# Altium PCB BLDC_Controller.PcbDoc
Units mm, origin at the board's own origin, x right, y up, seen from the top; angles counter-clockwise.
Board outline 23.6 x 24.89 mm, 4 copper layers (Top Layer, VCC, GND, Bottom Layer); 16 components, 15 nets, 93 pads, 8 vias.
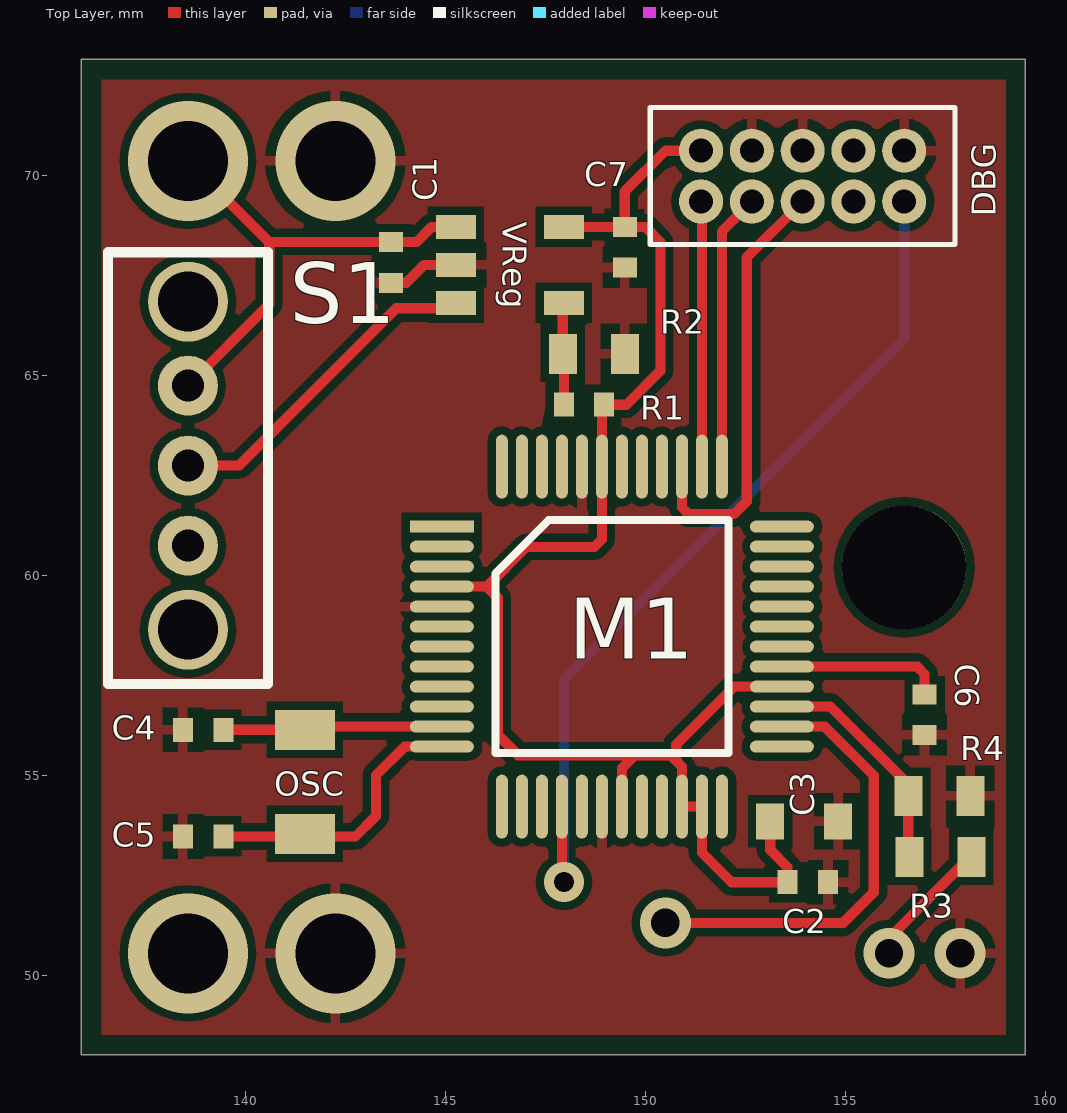
[diagram p0: Top Layer view]
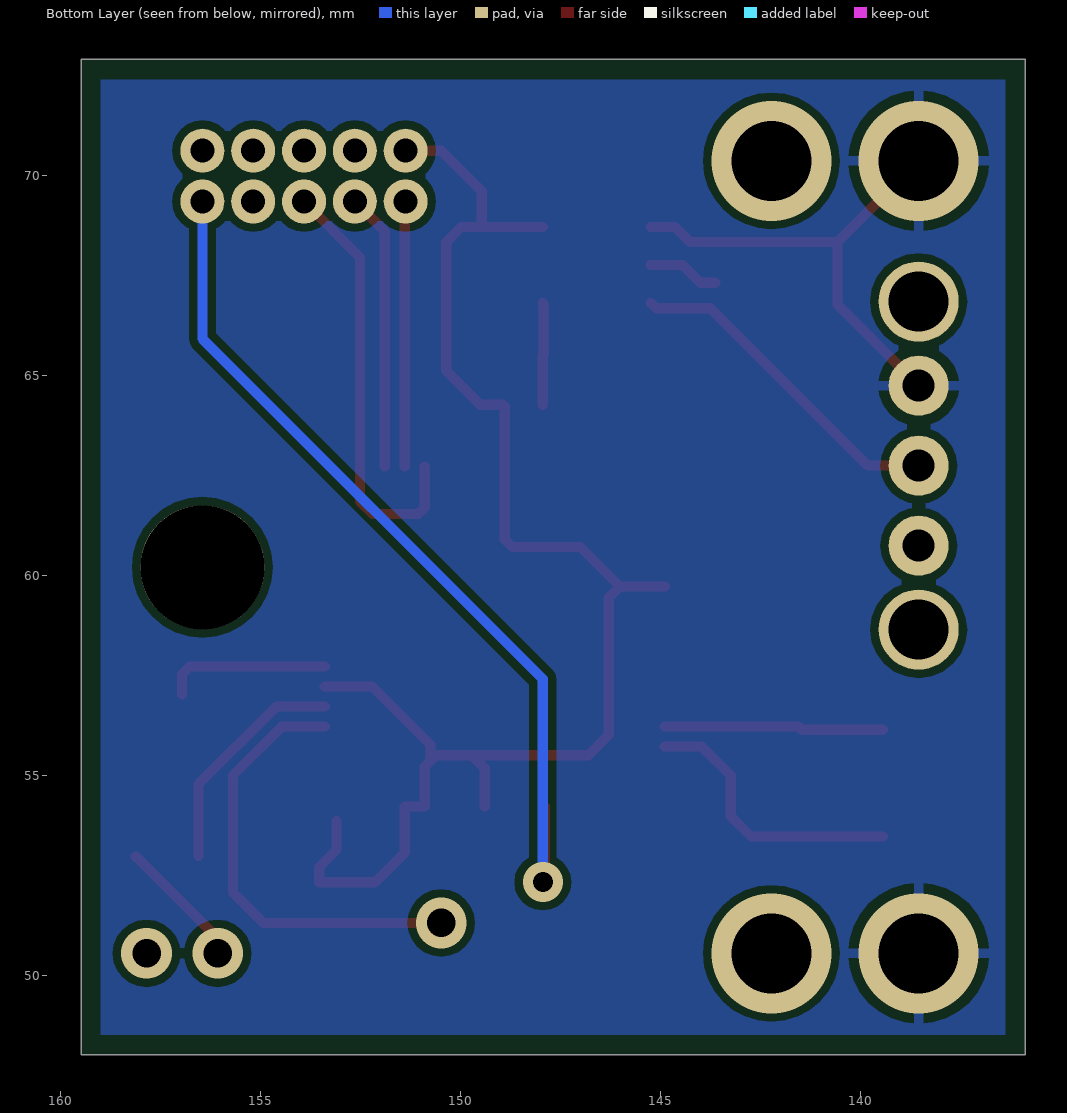
[diagram p1: Bottom Layer view, seen from below]
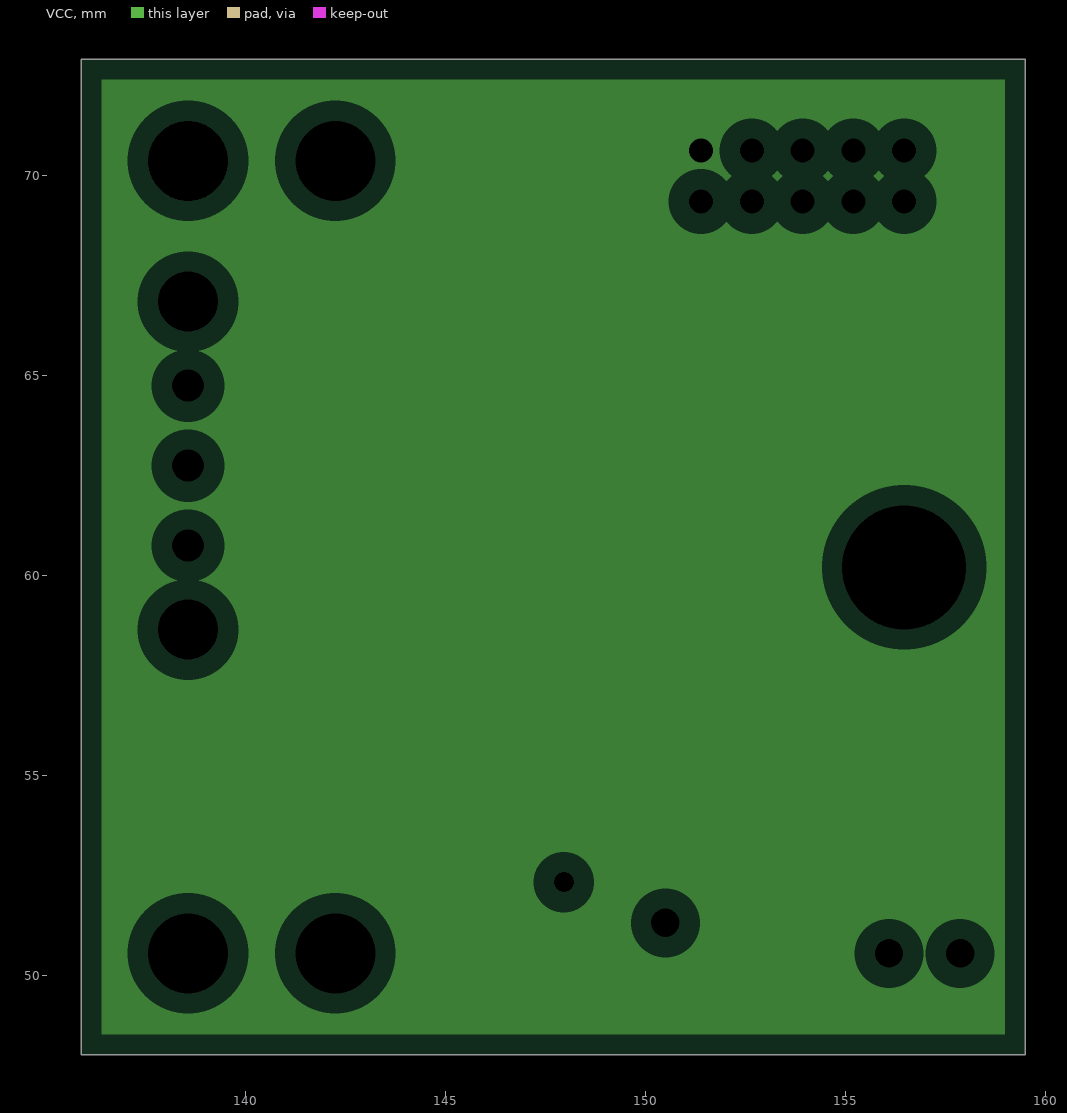
[diagram p2: VCC, clearances drawn from the general rule]
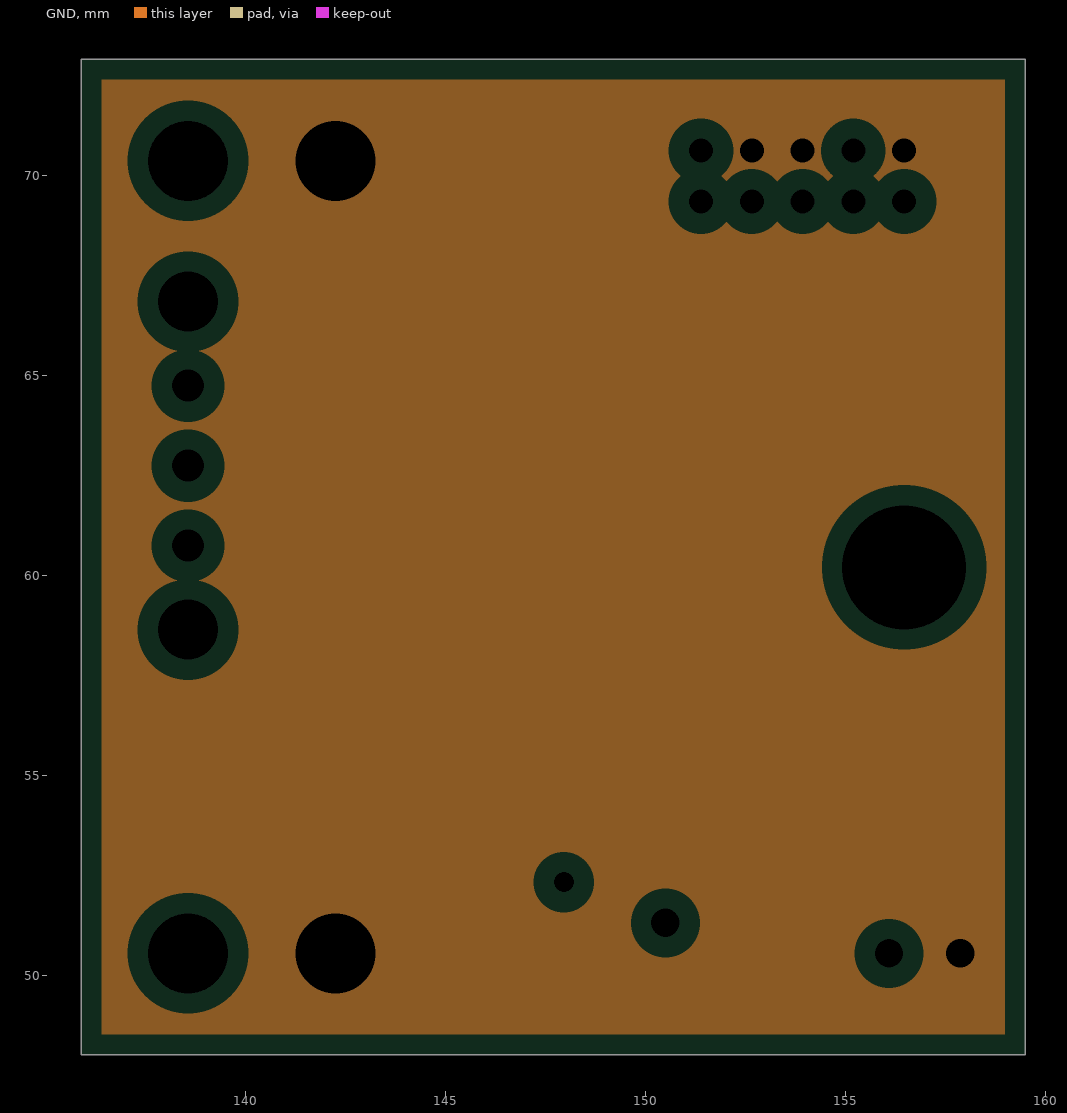
[diagram p3: GND, clearances drawn from the general rule]

## Layer stack, top to bottom
Top Layer: signal copper 0.0356
Dielectric: prepreg 0.32, FR-4, Dk 4.8
VCC: plane copper 0.0356, net 3V5
Dielectric: core 0.32, FR-4, Dk 4.8
GND: plane copper 0.0356, net GND
Dielectric: prepreg 0.32, FR-4, Dk 4.8
Bottom Layer: signal copper 0.0356

## Board outline
135.89,48.006 135.89,72.898 159.493,72.898 159.493,48.006

## Design rules (kind name [scope] priority, off if disabled: settings)
Clearance [All] p1: gap=0.2
PlaneClearance [All] p1: clearance=0.508
PlaneConnect [All] p1: planeconnectstyle=Relief reliefexpansion=0.508 reliefentries=4 reliefconductorwidth=0.254 reliefairgap=0.254
PolygonConnect [All] p1: connectstyle=Relief reliefconductorwidth=0.254 reliefentries=4 polygonreliefangle="90 Angle" airgapwidth=0.254
RoutingVias [All] p1: holewidth=0.711 width=1.27 viastyle="Through Hole" minholewidth=0.711 minwidth=1.27 maxholewidth=0.711 maxwidth=1.27
SolderMaskExpansion [All] p1: expansion=0.102
Width [All] p1: maxlimit=0.254 minlimit=0.2 preferedwidth=0.254
26 further rules are at their usual default settings.

## Components (designator, comment, footprint, x,y, rotation, side; value= is the part's Value field where it differs from the comment)
C1 "1u" "Capacitor 0402" 143.637,67.31 r90 top
C2 "100n" "Capacitor 0402" 153.543,52.324 r0 top
C3 "4.7u" "Capacitor 0603" 154.813,53.848 r180 top
C4 "12p" "Capacitor 0402" 138.43,56.134 r0 top
C5 "12p" "Capacitor 0402" 138.43,53.467 r0 top
C6 "1u" "Capacitor 0402" 156.972,57.023 r270 top
C7 "1u" "Capacitor 0402" 149.479,67.691 r90 top
DBG "20021111-00010T4LF" 20021111-00010T4LF 156.464,69.342 r180 top
M1 "EFM32TG822F32" EFM32TG822F32 144.907,61.214 r0 top
OSC "ST3215SB32768H5HSZA1" ST3215SB32768H5HSZA1 141.478,56.134 r270 top
R1 "1M" "Resistor 0402" 147.955,64.262 r0 top
R2 "536k" "Resistor 0603" 149.479,65.532 r180 top
R3 "Resistor 0603" "Resistor 0603" 156.591,52.959 r0 top
R4 "Resistor 0603" "Resistor 0603" 158.115,54.483 r180 top
S1 "OS102011MA1QN1" OS102011MA1QN1 138.557,62.738 r270 top
VReg "TPS78001DDCR" TPS78001DDCR 147.955,68.707 r270 top

## Footprints (in the part's own frame and the unit in brackets; to place one, negate y for a bottom-side part, rotate by r counter-clockwise, add the part's x,y. Pads: shape width x height; smd on the part's side, far side on the other; paste and mask are expansions set on the pad)
20021111-00010T4LF [mm]
  round 1.1 hole 0.6: 1(0,0) 2(1.27,0) 3(2.54,0) 4(3.81,0) 5(5.08,0) 6(0,-1.27) 7(1.27,-1.27) 8(2.54,-1.27) 9(3.81,-1.27) 10(5.08,-1.27)
  silkscreen extent -1.27,-2.35 6.35,1.08
"Capacitor 0402" [mm]
  rect 0.5x0.6 smd: 1(0,0) 2(1.016,0)
"Capacitor 0603" [mm]
  rect 0.7x0.9 smd: 1(0,0) 2(1.7,0)
EFM32TG822F32 [mm]
  rect 1.6x0.3 smd: 1(0,0)
  oval 1.6x0.3 smd: 2(0,-0.5) 3(0,-1) 4(0,-1.5) 5(0,-2) 6(0,-2.5) 7(0,-3) 8(0,-3.5) 9(0,-4) 10(0,-4.5) 11(0,-5) 12(0,-5.5) 25(8.5,-5.5) 26(8.5,-5) 27(8.5,-4.5) 28(8.5,-4) 29(8.5,-3.5) 30(8.5,-3) 31(8.5,-2.5) 32(8.5,-2) 33(8.5,-1.5) 34(8.5,-1) 35(8.5,-0.5) 36(8.5,0)
  oval 0.3x1.6 smd: 13(1.5,-7) 14(2,-7) 15(2.5,-7) 16(3,-7) 17(3.5,-7) 18(4,-7) 19(4.5,-7) 20(5,-7) 21(5.5,-7) 22(6,-7) 23(6.5,-7) 24(7,-7) 37(7,1.5) 38(6.5,1.5) 39(6,1.5) 40(5.5,1.5) 41(5,1.5) 42(4.5,1.5) 43(4,1.5) 44(3.5,1.5) 45(3,1.5) 46(2.5,1.5) 47(2,1.5) 48(1.5,1.5)
  silkscreen extent 1.33,-5.66 7.16,0.17
OS102011MA1QN1 [mm]
  round 1.5 hole 0.8: 1(-2,0) 2(0,0) 3(2,0)
  round 2 hole 1.5: ""(-4.1,0) ""(4.1,0)
  silkscreen extent -5.33,-2 5.46,2
"Resistor 0402" [mm]
  rect 0.5x0.6 smd: 1(0,0) 2(1,0)
"Resistor 0603" [mm]
  rect 0.7x1 smd: 1(0,0) 2(1.55,0)
ST3215SB32768H5HSZA1 [mm]
  rect 1x1.5 smd: 1(0,0) 2(2.6,0)
TPS78001DDCR [mm]
  rect 0.6x1 smd: 1(0,-2.7) 2(0.95,-2.7) 3(1.9,-2.7) 4(1.9,0) 5(0,0)

## Part data
C1 C2 C4 C5 C6 C7: library part "Capacitor 0402"
C3: library part "Capacitor 0603"
R1: library part "Resistor 0402"
R2: library part "Resistor 0603"

## Free pads (board coordinates)
  round 3.1 hole 3.1: 1(156.464,60.198)

## Via types
v1: diameter 3, hole 2, Top Layer to Bottom Layer, 4 vias
v2: diameter 1.27, hole 0.711, Top Layer to Bottom Layer, 3 vias
v3: diameter 1, hole 0.5, Top Layer to Bottom Layer, 1 vias

## Nets (pads, with @x,y where several pads share a name; then routed paths per layer and width w, separated by ;. In a path a pad name is that pad's centre, name@x,y a point inside that pad or via, vN(x,y) a via of type N, cw(c..) or ccw(c..) an arc to the next point about the centre after c; other vN are vias at no path point)
3V5: C2.1 C3.2 C7.2 DBG.10 M1.4 M1.19 M1.22 M1.23 M1.28 M1.43 R1.2 VReg.5 | length 39.3
  Top Layer w0.254: M1.4 146.026,59.714 ; VReg.5 C7.2 ; M1.19 149.407,55.173 149.733,55.499 ; DBG.10 150.495,70.612 149.479,69.596 C7.2 ; C3.2 153.113,53.135 153.543,52.705 C2.1 152.146,52.324 151.407,53.063 M1.23 M1.22 150.907,55.214 150.764,55.357 ; M1.28 152.21,57.214 150.764,55.768 150.764,55.357 ; 146.026,59.714 147.018,60.706 148.717,60.706 148.907,60.896 M1.43 148.907,64.214 R1.2 149.521,64.262 150.368,65.109 150.368,68.326 149.987,68.707 C7.2 ; 146.026,59.714 146.304,59.436 146.304,56.007 146.812,55.499 149.733,55.499 ; 149.733,55.499 150.622,55.499 150.764,55.357
12V: C1.2 S1.1 VReg.1 | length 12.1
  Top Layer w0.254: S1.1 140.589,66.77 140.589,68.326 ; v1(138.557,70.358) 140.589,68.326 ; VReg.1 144.653,68.707 144.272,68.326 140.589,68.326
  other v1: 138.557,50.546
DRIVE: R3.2 | length 3.3
  Top Layer w0.254: v2(156.083,50.546) 156.083,50.927 158.115,52.959 R3.2
GND: C1.1 C2.2 C3.1 C4.1 C5.1 C6.2 C7.1 DBG.6 DBG.8 DBG.9 M1.5 M1.18 M1.44 R2.1 R4.1 VReg.2 | length 1.8
  Top Layer w0.254: C1.1 144.018,67.31 144.465,67.757 VReg.2 ; DBG.8 DBG.8@153.924,70.659
  other v1: 142.24,50.546 142.24,70.358
  other v2: 157.861,50.546
NetC4_2: C4.2 M1.11 OSC.1 | length 5.5
  Top Layer w0.254: C4.2 OSC.1 141.558,56.214 M1.11
NetC5_2: C5.2 M1.12 OSC.2 | length 7
  Top Layer w0.254: C5.2 142.748,53.467 143.256,53.975 143.256,54.991 143.979,55.714 M1.12
NetC6_1: C6.1 M1.29 | length 4.1
  Top Layer w0.254: M1.29 156.789,57.714 156.972,57.531 C6.1
NetM1_27: M1.27 R3.1 R4.2 | length 5.7
  Top Layer w0.254: M1.27 154.621,56.714 156.565,54.77 R4.2 R3.1@156.565,52.985
NetR1_1: R1.1 R2.2 VReg.4 | length 2.6
  Top Layer w0.254: R1.1 147.955,65.506 R2.2 147.929,66.781 VReg.4
NetS1_2: S1.2 VReg.3 | length 8.4
  Top Layer w0.254: S1.2 139.827,62.738 143.764,66.675 145.123,66.675 VReg.3
PWM: M1.26 | length 11.2
  Top Layer w0.254: v2(150.495,51.308) 154.94,51.308 155.702,52.07 155.702,54.991 154.479,56.214 M1.26
RESETN: DBG.1 M1.16 | length 22.4
  Top Layer w0.254: v3@147.907,52.324 M1.16
  Bottom Layer w0.254: v3(147.955,52.324) 147.955,57.404 156.464,65.913 DBG.1
SWCLK: DBG.4 M1.37 | length 6.9
  Top Layer w0.254: M1.37 151.907,68.595 DBG.4
SWDIO: DBG.5 M1.38 | length 6.6
  Top Layer w0.254: DBG.5 151.407,69.319 M1.38
SWO: DBG.3 M1.39 | length 10.9
  Top Layer w0.254: M1.39 150.907,61.691 151.065,61.533 152.211,61.533 152.527,61.849 152.527,67.945 DBG.3
pads on no net: DBG.2 DBG.7 M1.1 M1.2 M1.3 M1.6 M1.7 M1.8 M1.9 M1.10 M1.13 M1.14 M1.15 M1.17 M1.20 M1.21 M1.24 M1.25 M1.30 M1.31 M1.32 M1.33 M1.34 M1.35 M1.36 M1.40 M1.41 M1.42 M1.45 M1.46 M1.47 M1.48 S1. S1.3

## Polygon pours and split planes (outlines as drawn)
12V on Bottom Layer "Bottom Layer-No Net" (solid, pour order 4): 136.398,72.39 159.004,72.39 159.004,48.514 136.398,48.514
GND on Top Layer "Bottom Layer-No Net" (solid, pour order 3): 159.004,48.514 159.004,72.39 136.398,72.39 136.398,48.514
3V5 on VCC (split plane): 158.983,48.516 136.4,48.516 136.4,72.388 158.983,72.388
GND on GND (split plane): 158.983,48.516 136.4,48.516 136.4,72.388 158.983,72.388

## Silkscreen, mask and mechanical layers (free items; w line width, h text height)
Mechanical 1:
  the board outline again, w0.254